# EAGLE board voltage_sensor (EAGLE 9.6.2)
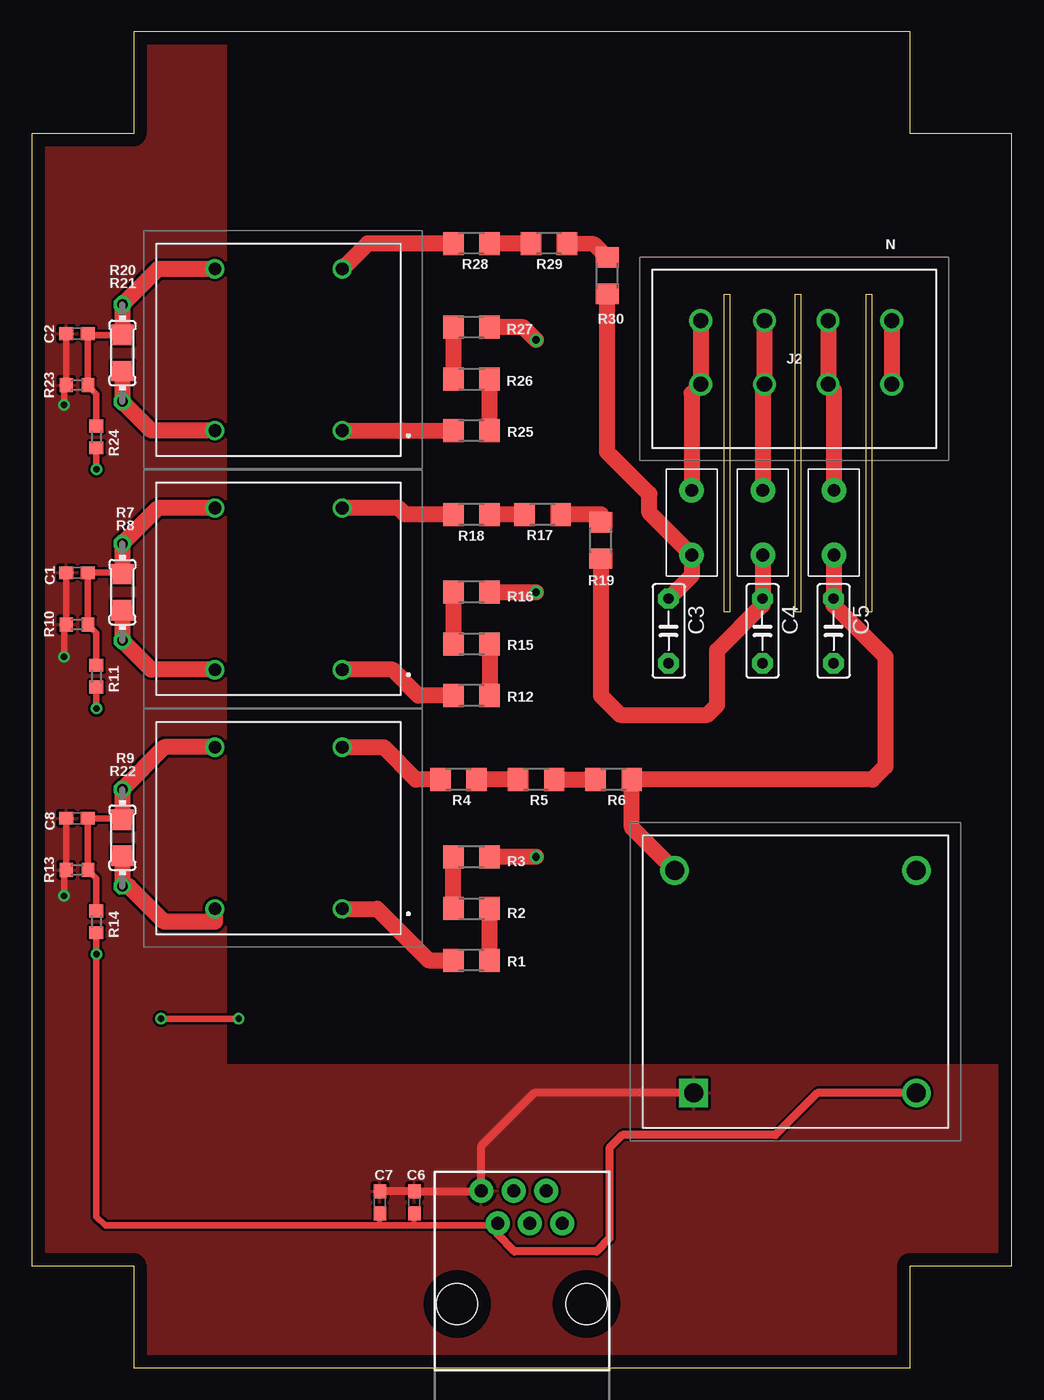
[diagram p0: board, top side]
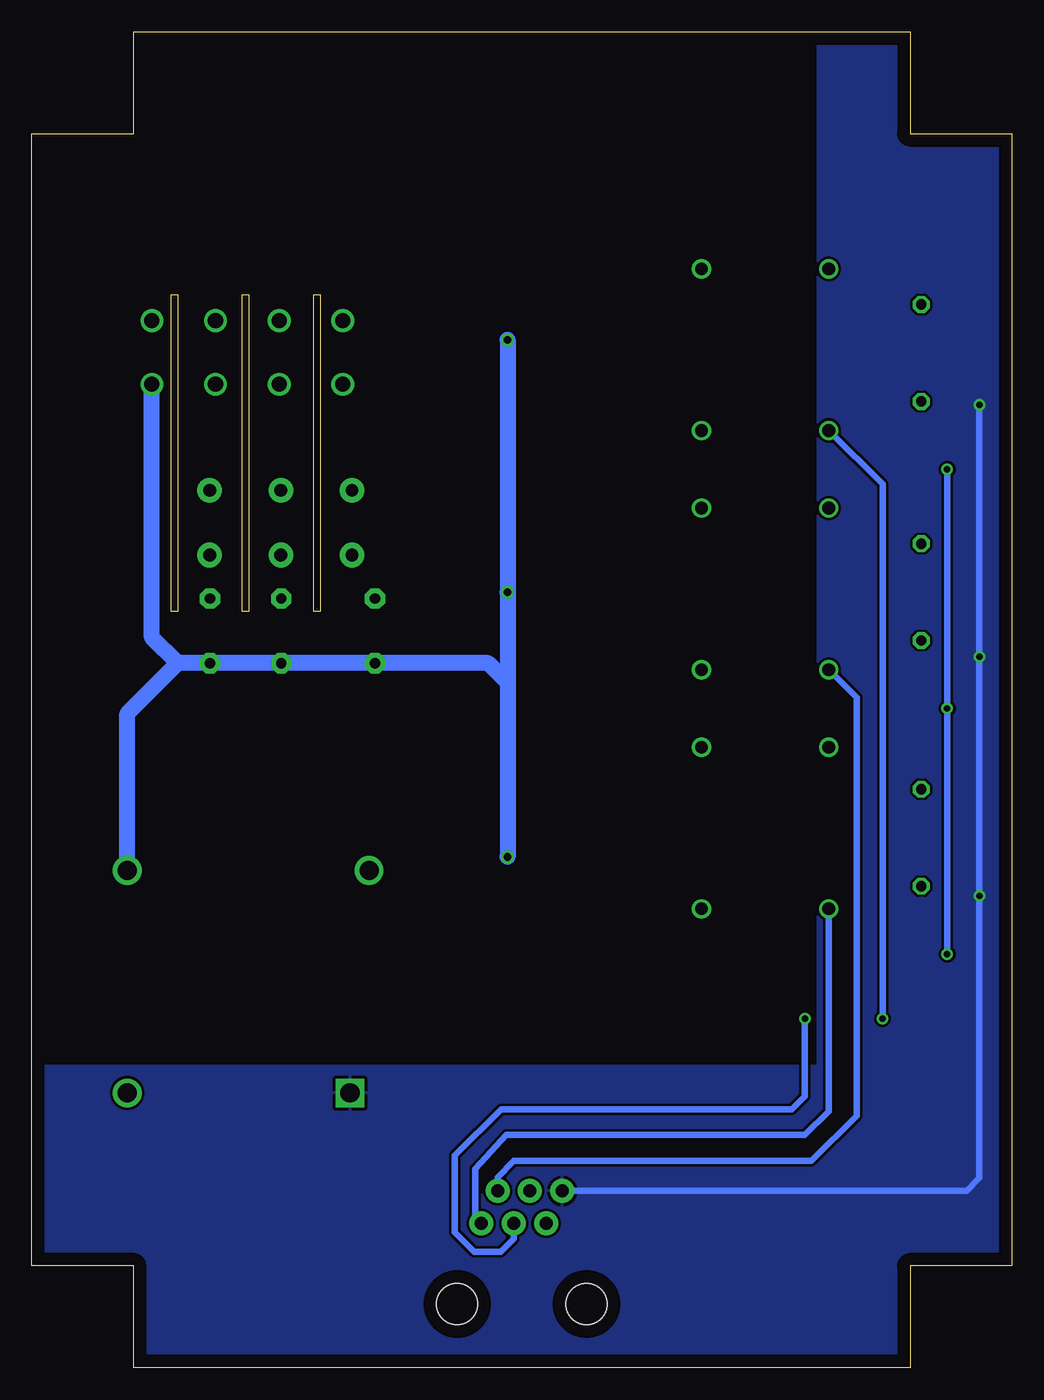
[diagram p1: board, bottom side, seen from below]

Size 77 x 105 mm. Coordinates in mm from the lower left corner, seen from the top.
Outline: 0,8 8,8 8,0 69,0 69,8 77,8 77,97 69,97 69,105 8,105 8,97 0,97 0,8
Copper layers (1*16): Top 0.035mm / dielectric 1.5mm / Bottom 0.035mm
Design rules "voltage_sensor *": minimum track width 6mil, minimum drill 0.35mm, track to track 0.205mm, track to pad 0.205mm, pad to pad 0.205mm, via to via 0.205mm, smd to smd 6mil, copper to edge 40mil, drill to drill 6mil, minimum pad ring 10mil, minimum via ring 8mil, stop-mask expansion 4mil, vias tented up to drill 0.6mm, thermal gap 10mil
Net classes: 0 default: clearance 0.205 mm; 1 power: width 0.305 mm, drill 0.6 mm, clearance 0.254 mm; 2 gnd: width 0.254 mm, drill 0.6 mm, clearance 0.254 mm
Milling: area 54.4,59.4 to 54.9,84.3; area 59.9,59.4 to 60.5,84.3; area 65.5,59.4 to 66,84.3

## Footprints (pad centres in the part's own frame; a part is rotated, then mirrored left to right if it is on the bottom)
C0603 = smd 1.1 x 1: 1 -0.85,0; 2 0.85,0
C5B2.5 = drill 0.813 pad 1.6 octagon: 1 -2.54,0; 2 2.54,0
BELFUSE1A = drill 1 pad 1.93: IN 2,1.66; OUT 2,6.74
236404000009999950 = drill 1.19 pad 1.785: 1 0,0; 2 0,5; 3 5,0; 4 5,5; 5 10,0; 6 10,5; 7 15,0; 8 15,5
RJ11-6 = drill 1.016 pad 1.88: 1 -3.175,8.89; 2 -1.905,6.35; 3 -0.635,8.89; 4 0.635,6.35; 5 1.905,8.89; 6 3.175,6.35 | hole 3.251: -5.08,0; 5.08,0
VTX214001105 = drill 1.5 pad 2.25 square: 1 0,0 | drill 1.5 pad 2.25: 2 0,17.5; 3 -17.5,17.5; 4 -17.5,-1.5
R1206 = smd 1.6 x 1.803: 1 -1.422,0; 2 1.422,0
0204/7 = drill 0.813 octagon: 1 -3.81,0; 2 3.81,0
R0603 = smd 1 x 1.1: 1 -0.85,0; 2 0.85,0
ZMPT101B = drill 1 pad 1.5: 1 0,0; 2 0,-12.7; 3 10,-12.7; 4 10,0

## Placement (x,y rotation side)
C1  10uF  [C0603]  3.56,62.48 180 top
C2  10uF  [C0603]  3.56,81.28 180 top
C3  [C5B2.5]  50.04,57.91 270 top
C4  [C5B2.5]  57.4,57.91 270 top
C5  [C5B2.5]  62.99,57.91 270 top
C6  10uF  [C0603]  30.06,13 90 top
C7  10uF  [C0603]  27.35,13 90 top
C8  10uF  [C0603]  3.56,43.18 180 top
F1  BEL1AFUSE  [BELFUSE1A]  65.02,70.61 180 top
F2  BEL1AFUSE  [BELFUSE1A]  59.44,70.61 180 top
F3  BEL1AFUSE  [BELFUSE1A]  53.85,70.61 180 top
J2  236-404_000-009_999-950  [236404000009999950]  67.56,82.3 180 top
J9  RJ11  [RJ11-6]  38.5,5 0 top
PS1  VTX-214-001-105  [VTX214001105]  52,21.59 270 top
R1  [R1206]  34.54,32.02 0 top
R2  [R1206]  34.54,36.08 180 top
R3  [R1206]  34.54,40.15 0 top
R4  [R1206]  33.53,46.23 0 top
R5  [R1206]  39.62,46.23 0 top
R6  [R1206]  45.72,46.23 0 top
R7  [0204/7]  7.11,60.96 270 top
R8  [R1206]  7.11,60.96 270 top
R9  [R1206]  7.11,41.66 270 top
R10  3.3k  [R0603]  3.56,58.42 180 top
R11  18k  [R0603]  5.08,54.36 270 top
R12  [R1206]  34.54,52.83 0 top
R13  3.3k  [R0603]  3.56,39.12 180 top
R14  18k  [R0603]  5.08,35.05 270 top
R15  [R1206]  34.54,56.9 180 top
R16  [R1206]  34.54,60.96 0 top
R17  [R1206]  34.54,67.06 0 top
R18  [R1206]  40.13,67.06 0 top
R19  [R1206]  44.7,65.02 270 top
R20  [0204/7]  7.11,79.76 270 top
R21  [R1206]  7.11,79.76 270 top
R22  [0204/7]  7.11,41.66 270 top
R23  3.3k  [R0603]  3.56,77.22 180 top
R24  18k  [R0603]  5.08,73.15 270 top
R25  [R1206]  34.54,73.64 0 top
R26  [R1206]  34.54,77.71 180 top
R27  [R1206]  34.54,81.77 0 top
R28  [R1206]  34.54,88.36 0 top
R29  [R1206]  40.64,88.36 0 top
R30  [R1206]  45.21,85.84 270 top
T1  ZMPT101B  [ZMPT101B]  24.38,36.07 180 top
T2  ZMPT101B  [ZMPT101B]  24.38,54.86 180 top
T3  ZMPT101B  [ZMPT101B]  24.38,73.66 180 top

## Library data of the parts
C1 C2 C6-C8 = resistor
C3-C5 = capacitor-wima
F1-F3 = Qxd
J2 = 236-404_000-009_999-950; ARROW_PART_NUMBER: 236-404/000-009/999-950; ARROW_PRICE-STOCK: https://www.arrow.com/en/products/236-404000-009999-950/wago-kontakttechnik-gmbh; DESCRIPTION: PCB TERMINAL STRIP, 2 SOLDER PINS/POLE, 4-POLE; HEIGHT: 13mm; MANUFACTURER_NAME: Wago; MANUFACTURER_PART_NUMBER: 236-404/000-009/999-950
J9 = SparkFun-Connectors; PROD_ID: CONN-08590; SF_ID: PRT-00132
PS1 = VTX-214-001-105; DESCRIPTION: VIGORTRONIX - VTX-214-001-105 - AC-DC CONV, FIXED, 1 O/P, 1W, 5V; HEIGHT: 19mm; MANUFACTURER_NAME: VIGORTRONIX; MANUFACTURER_PART_NUMBER: VTX-214-001-105
R1-R30 = rcl
T1-T3 = ZMPT101B; DESCRIPTION: Current-type Voltage Transformer; HEIGHT: 18.8mm; MANUFACTURER_NAME: Qingxian Zeming Langxi Electronic; MANUFACTURER_PART_NUMBER: ZMPT101B

## Nets
3.3V: C6.1 C7.1 J9.2 PS1.2 R11.2 R14.2 R24.2
BIAS: J9.3
GND: C1.2 C2.2 C6.2 C7.2 C8.2 J9.1 PS1.1 R10.2 R13.2 R23.2
L1: C5.1 F1.OUT PS1.4 R6.2
L2: C4.1 F2.OUT R19.2
L3: C3.1 F3.OUT R30.2
N$1: R1.1 T1.1
N$2: R4.1 T1.2
N$3: R1.2 R2.1
N$4: R4.2 R5.1
N$5: R5.2 R6.1
N$6: R2.2 R3.1
N$7: F1.IN J2.3 J2.4
N$8: F2.IN J2.5 J2.6
N$9: C1.1 R7.1 R8.1 R10.1 R11.1 T2.3
N$10: R12.1 T2.1
N$11: R17.1 T2.2
N$12: R12.2 R15.1
N$13: R17.2 R18.1
N$14: R18.2 R19.1
N$15: R15.2 R16.1
N$16: F3.IN J2.7 J2.8
N$18: C2.1 R20.1 R21.1 R23.1 R24.1 T3.3
N$19: R25.1 T3.1
N$20: R28.1 T3.2
N$21: R25.2 R26.1
N$22: R28.2 R29.1
N$23: R29.2 R30.1
N$24: R26.2 R27.1
N$25: C8.1 R9.1 R13.1 R14.1 R22.1 T1.3
NEUTRAL: C3.2 C4.2 C5.2 J2.1 J2.2 PS1.3 R3.2 R16.2 R27.2
VS1: J9.6 R9.2 R22.2 T1.4
VS2: J9.5 R7.2 R8.2 T2.4
VS3: J9.4 R20.2 R21.2 T3.4

## Tracks (layer width: path | path; a pad name or v marks a point on that pad's centre or on a via)
3.3V  (via drill 0.5)
  Top 0.406: 30.06,11.18 C6.1 | 27.35,11.18 C7.1
  Top 0.508: R24.2 v5.08,70.61 | R11.2 v5.08,51.82 | R14.2 v5.08,32.51 5.08,11.86 5.76,11.18 27.35,11.18 30.06,11.18 36.42,11.18 J9.2
  Top 0.61: PS1.2 61.72,21.59 58.42,18.29 46.4,18.29 45.38,17.27 45.38,10.16 44.37,9.14 37.92,9.14 36.59,10.47 J9.2
  Bottom 0.508: v5.08,70.61 v5.08,51.82 v5.08,32.51
GND  (via drill 0.5)
  Top 0.508: C2.2 R23.2 2.54,77.05 v2.54,75.69 | C1.2 R10.2 2.54,58.25 v2.54,55.88 | v2.54,37.08 2.54,38.95 R13.2 C8.2
  Top 0.61: PS1.1 39.46,21.59 35.33,17.45 J9.1 35.28,13.85 C6.2 C7.2
  Bottom 0.508: v2.54,75.69 v2.54,55.88 v2.54,37.08 2.54,14.91 3.56,13.89 J9.1
  pour Top: -1,105 -1,-1 79,-1 79,23.73 15.22,23.73 15.22,105
  pour Bottom: -2,106 -2,-2 80,-2 80,23.73 15.22,23.73 15.22,105 8,105 7,106
L1
  Top 1.27: PS1.4 47.14,42.45 R6.2 66.04,46.23 67.06,47.24 67.06,55.88 62.99,59.94 C5.1 63.02,60.48 F1.OUT
L2
  Top 1.27: 44.81,63.5 R19.2 44.7,52.83 46.23,51.31 53.09,51.31 53.85,52.07 53.85,56.39 57.4,59.94 C4.1 57.44,60.48 F2.OUT
L3
  Top 1.27: C3.1 51.85,62.26 F3.OUT 48.51,67.21 48.51,68.68 45.21,71.98 R30.2
N$1
  Top 1.27: T1.1 27.14,36.07 31.18,32.02 R1.1
N$2
  Top 1.27: T1.2 27.64,48.77 30.18,46.23 R4.1
N$3
  Top 1.27: R1.2 R2.1
N$4
  Top 1.27: R5.1 R4.2
N$5
  Top 0.508: R5.2
  Top 1.27: R5.2 R6.1
N$6
  Top 1.27: R2.2 R3.1
N$7
  Top 1.27: J2.3 J2.4 63.02,76.84 F1.IN
N$8
  Top 1.27: J2.5 J2.6 57.44,77.17 F2.IN
N$9
  Top 0.508: 4.66,62.74 C1.1 | C1.1 R10.1 5.08,57.75 R11.1 | R8.1 7.01,62.48 C1.1
  Top 1.27: T2.3 9.91,67.56 R7.1 R8.1
N$10
  Top 1.27: R12.1 30.37,52.83 28.34,54.86 T2.1
N$11
  Top 1.27: R17.1 29.36,67.06 28.85,67.56 T2.2
N$12
  Top 1.27: R15.1 R12.2
N$13
  Top 0.61: R18.1
  Top 1.27: R18.1 R17.2
N$14
  Top 0.508: R19.1 44.7,67.06
  Top 1.27: 44.7,67.06 R18.2
N$15
  Top 1.27: R16.1 R15.2
N$16
  Top 1.27: J2.7 J2.8 51.85,76.58 F3.IN
N$18
  Top 0.508: R21.1 4.51,81.18 C2.1 R23.1 5.08,76.54 5.08,75.18 5.08,74.59 R24.1
  Top 1.27: T3.3 9.91,86.36 R20.1 R21.1
N$19
  Top 1.27: T3.1 29.04,73.66 29.05,73.64 R25.1
N$20
  Top 1.27: T3.2 26.38,88.36 R28.1
N$21
  Top 1.27: R25.2 R26.1
N$22
  Top 1.27: R29.1 R28.2
N$23
  Top 1.27: R29.2 44.18,88.29 R30.1
N$24
  Top 1.27: R27.1 R26.2
N$25
  Top 0.508: R14.1 5.08,38.44 R13.1 C8.1 7.01,43.18 R9.1
  Top 1.27: T1.3 10.41,48.77 R22.1 R9.1
NEUTRAL  (via drill 0.6)
  Top 1.27: v39.62,40.15 R3.2 | v39.62,80.77 38.62,81.77 R27.2 | R16.2 v39.62,60.96 | J2.1 J2.2
  Bottom 1.27: v39.62,80.77 v39.62,60.96 39.62,53.85 | 39.62,53.85 v39.62,40.15 | 39.62,53.85 41.15,55.37 C3.2 C4.2 C5.2 65.53,55.37 | 65.53,55.37 67.56,57.4 J2.2 | PS1.3 69.5,51.4 65.53,55.37
VS1
  Top 0.508: R22.2 7.62,37.85 | 7.62,37.85
  Top 1.27: 14.38,35.05 10.41,35.05 7.62,37.85 | R9.2 R22.2 | T1.4 14.38,35.05 | 14.38,35.05
  Bottom 0.508: J9.6 42.16,11.35 42.16,15.62 39.71,18.29 16.26,18.29 14.38,20.16 T1.4
VS2
  Top 1.27: T2.4 9.4,54.86 R7.2 R8.2
  Bottom 0.508: T2.4 12.19,52.67 12.19,19.81 15.75,16.26 39.12,16.26 40.41,14.97 J9.5
VS3  (via drill 0.5)
  Top 0.508: v10.16,27.43 v16.26,27.43
  Top 1.27: T3.4 9.4,73.66 R20.2 R21.2
  Bottom 0.508: T3.4 10.16,69.44 v10.16,27.43 | J9.4 39.13,10.13 39.14,10.14 40.15,9.13 42.26,9.13 43.78,10.65 43.78,16.67 40.13,20.32 17.27,20.32 16.26,21.34 v16.26,27.43

## Text on the board
tNames: N
tSilk: L3 | L2 | L1 | N